# EAGLE board hackaday.com-ir-receiver-v1a (EAGLE 5.02)
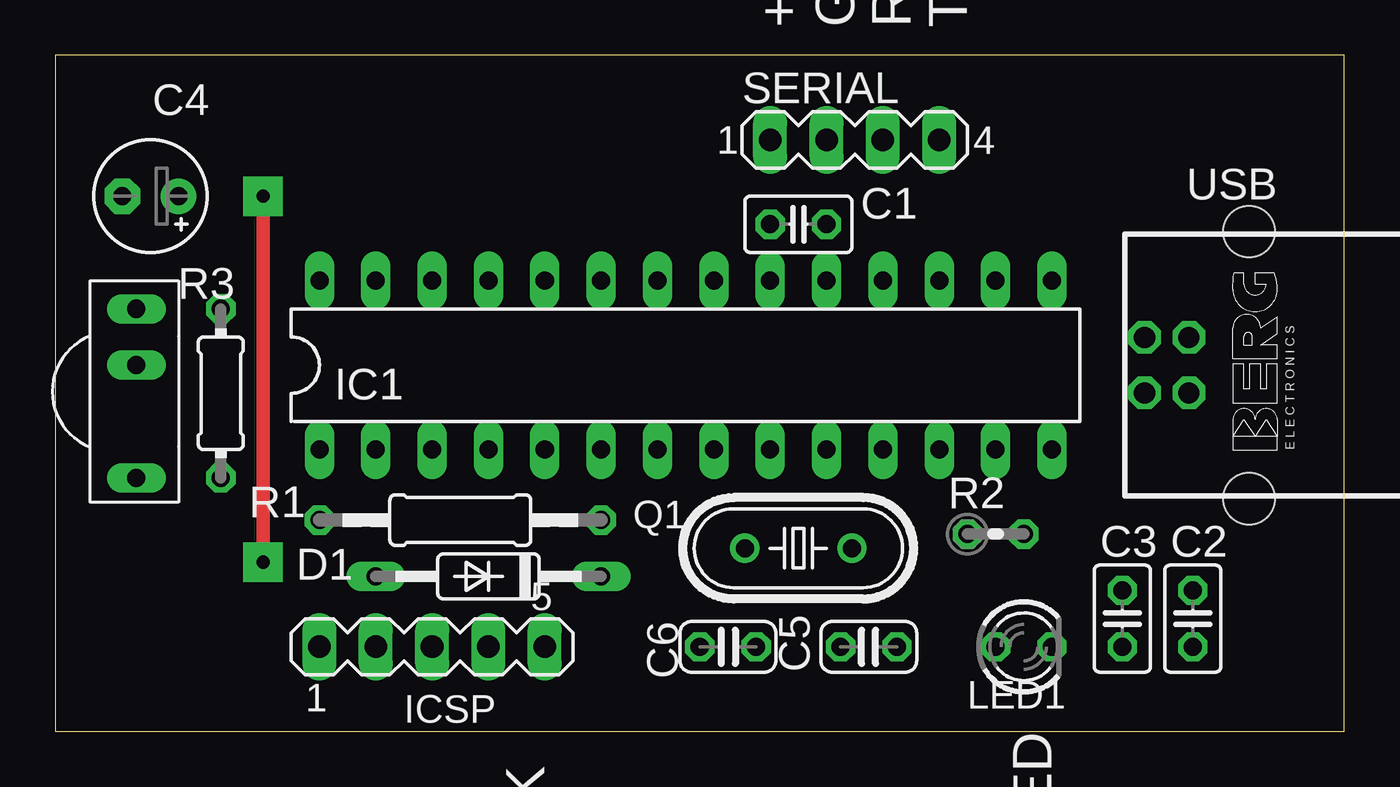
[diagram p0: board, top side]
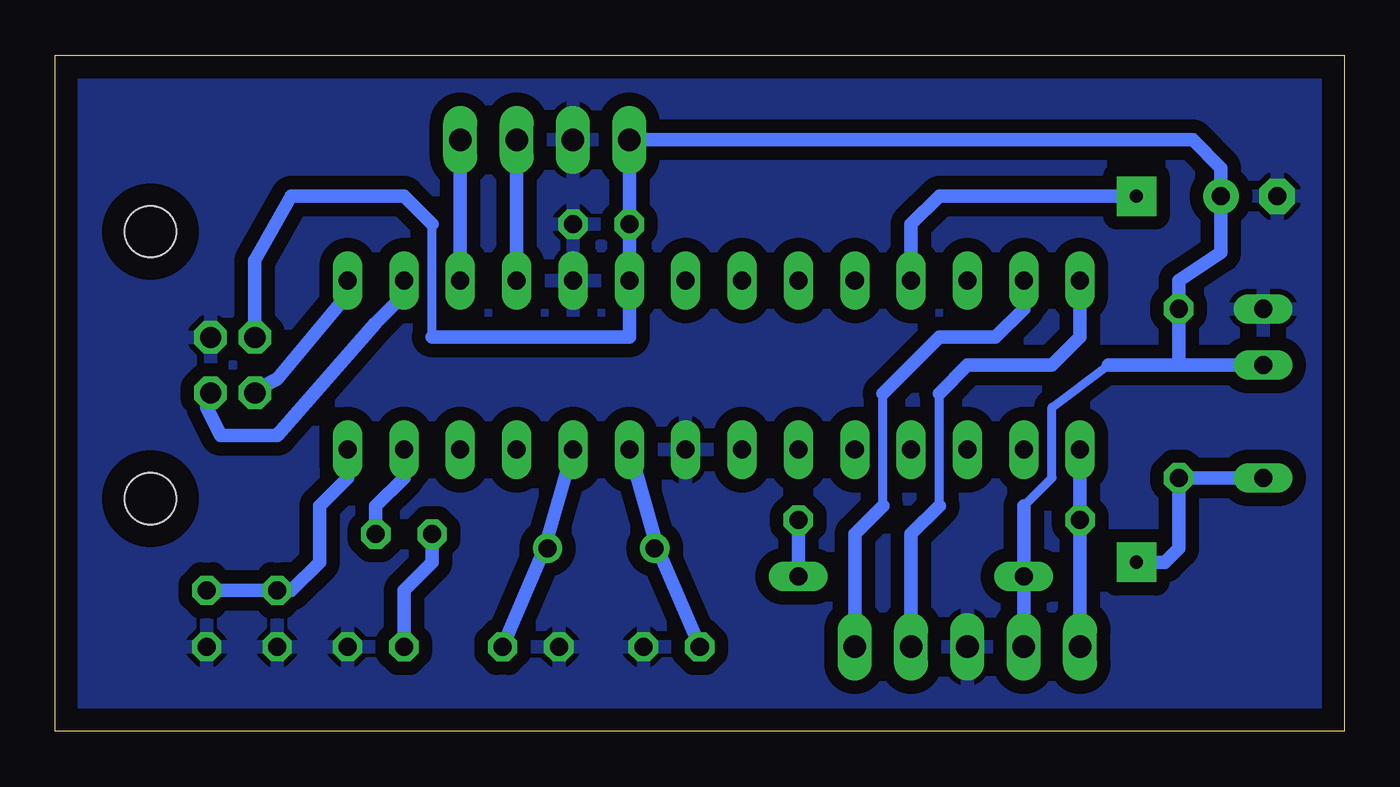
[diagram p1: board, bottom side, seen from below]

Size 58.09 x 30.47 mm. Coordinates in mm from the lower left corner, seen from the top.
Outline: 0,0 58.09,0 58.09,30.47 0,30.47 0,0
Copper layers (1*16): Top 0.035mm / dielectric 1.5mm / Bottom 0.035mm
Design rules "10mils": minimum track width 10mil, minimum drill 24mil, track to track 10mil, track to pad 10mil, pad to pad 10mil, via to via 10mil, smd to smd 10mil, copper to edge 40mil, drill to drill 10mil, minimum pad ring 10mil, minimum via ring 8mil, stop-mask expansion 0mil, vias tented up to drill 0mil, thermal gap 10mil

## Footprints (pad centres in the part's own frame; a part is rotated, then mirrored left to right if it is on the bottom)
C025-025X050 = drill 0.813 octagon: 1 -1.27,0; 2 1.27,0
E2,5-5 = drill 0.813 pad 1.6 round: + -1.27,0 | drill 0.813 pad 1.6 octagon: - 1.27,0
C025-024X044 = drill 0.813 octagon: 1 -1.27,0; 2 1.27,0
DO35-10 = drill 0.813 long: A 5.08,0; C -5.08,0
DIL28-3 = drill 0.813 long: 1 -16.51,-3.81; 2 -13.97,-3.81; 3 -11.43,-3.81; 4 -8.89,-3.81; 5 -6.35,-3.81; 6 -3.81,-3.81; 7 -1.27,-3.81; 8 1.27,-3.81; 9 3.81,-3.81; 10 6.35,-3.81; 11 8.89,-3.81; 12 11.43,-3.81; 13 13.97,-3.81; 14 16.51,-3.81; 15 16.51,3.81; 16 13.97,3.81; 17 11.43,3.81; 18 8.89,3.81; 19 6.35,3.81; 20 3.81,3.81; 21 1.27,3.81; 22 -1.27,3.81; 23 -3.81,3.81; 24 -6.35,3.81; 25 -8.89,3.81; 26 -11.43,3.81; 27 -13.97,3.81; 28 -16.51,3.81
MA05-1 = drill 1.016 long: 1 -5.08,0; 2 -2.54,0; 3 0,0; 4 2.54,0; 5 5.08,0
LED3MM = drill 0.813 octagon: A -1.27,0; K 1.27,0
HC49U-V = drill 0.813 round: 1 -2.413,0; 2 2.413,0
0207/12 = drill 0.813 octagon: 1 -6.35,0; 2 6.35,0
0204V = drill 0.813 octagon: 1 -1.27,0; 2 1.27,0
0204/7 = drill 0.813 octagon: 1 -3.81,0; 2 3.81,0
MA04-1 = drill 1.016 long: 1 -3.81,0; 2 -1.27,0; 3 1.27,0; 4 3.81,0
TSOP17XX = drill 0.813 long: GND -3.81,0; OUT 3.81,0; V+ -1.27,0
PN61729 = drill 0.95 octagon: 1 1.25,4.71; 2 -1.25,4.71; 3 -1.25,2.71; 4 1.25,2.71 | hole 2.3: -6.02,0; 6.02,0

## Placement (x,y rotation side)
C1  0.1uf  [C025-025X050]  33.49,22.86 0 top
C2  0.1uf  [C025-025X050]  51.27,5.08 270 top
C3  0.1uf  [C025-025X050]  48.09,5.08 270 top
C4  4.7Uf  [E2,5-5]  4.28,24.12 180 top
C5  27pf  [C025-024X044]  36.67,3.81 180 top
C6  27pf  [C025-024X044]  30.32,3.81 0 top
D1  1N4148  [DO35-10]  19.52,6.98 180 top
IC1  PIC18F2550_28DIP  [DIL28-3]  28.41,16.51 0 top
ICSP  [MA05-1]  16.98,3.81 0 top
LED1  [LED3MM]  43.65,3.81 0 top
Q1  20Mhz  [HC49U-V]  33.49,8.25 180 top
R1  10k  [0207/12]  18.25,9.52 0 top
R2  330R  [0204V]  42.38,8.88 0 top
R3  10k  [0204/7]  7.45,15.24 90 top
SERIAL  [MA04-1]  36.03,26.66 0 top
TSOP-1738  TSOP1736  [TSOP17XX]  3.64,15.24 270 top
USB  [PN61729]  53.81,16.51 90 top

## Library data of the parts
C1-C6 R1-R3 = rcl
D1 = diode
IC1 = microchip
ICSP SERIAL = con-lstb
LED1 = led
Q1 = crystal
TSOP-1738 = tsop
USB = con-berg

## Nets
GND: C1.2 C2.2 C3.2 C4.- C5.2 C6.2 IC1.8 IC1.19 ICSP.3 LED1.K SERIAL.2 TSOP-1738.GND USB.4
IRDATA: IC1.25 R3.1 TSOP-1738.OUT
MCLR: IC1.1 ICSP.1 R1.1
N$1: C6.1 IC1.9 Q1.2
N$2: C5.1 IC1.10 Q1.1
N$3: C2.1 C3.1 IC1.14
N$4: IC1.17 SERIAL.4
N$5: IC1.18 SERIAL.3
N$7: LED1.A R2.1
N$17: D1.C R1.2
N$27: IC1.13 R2.2
PGC: IC1.27 ICSP.5
PGD: IC1.28 ICSP.4
RC4: IC1.15 USB.2
RC5: IC1.16 USB.3
VCC: C1.1 C4.+ D1.A IC1.20 ICSP.2 R3.2 SERIAL.1 TSOP-1738.V+ USB.1

## Tracks (layer width: path | path; a pad name or v marks a point on that pad's centre or on a via)
GND
  pour Bottom (isolate 0.61): 0.47,29.2 57.62,29.2 57.62,1.27 0.47,1.27
IRDATA  (via drill 0.6 pad 1.78)
  Top 0.61: v9.36,7.62 v9.36,24.12
  Bottom 0.61: TSOP-1738.OUT R3.1 7.45,8.25 8.09,7.62 v9.36,7.62 | v9.36,24.12 18.25,24.12 19.52,22.86 IC1.25
MCLR
  Bottom 0.61: ICSP.1 11.9,8.88 | 11.9,8.88 R1.1 | 11.9,8.88 IC1.1
N$1
  Bottom 0.61: C6.1 30.95,8.25 | 30.95,8.25 Q1.2 | 30.95,8.25 IC1.9
N$2
  Bottom 0.61: 36.03,8.25 Q1.1 | 36.03,8.25 IC1.10 | C5.1 36.03,8.25
N$3
  Bottom 0.61: C2.1 C3.1 47.46,6.35 46.19,7.62 46.19,10.15 44.92,11.42 IC1.14
N$4
  Bottom 0.61: IC1.17 SERIAL.4
N$5
  Bottom 0.61: IC1.18 SERIAL.3
N$7
  Bottom 0.61: LED1.A 42.38,6.35 41.11,7.62 R2.1
N$17
  Bottom 0.61: D1.C R1.2
N$27
  Bottom 0.61: IC1.13 42.38,11.42 43.65,10.15 R2.2
N$31
  pour Bottom (isolate 0.61): 0.47,29.2 57.62,29.2 57.62,1.27 0.47,1.27
PGC
  Bottom 0.406: 20.79,10.15 20.79,15.24
  Bottom 0.61: ICSP.5 22.06,8.88 20.79,10.15 | 20.79,15.24 18.25,17.77 15.71,17.77 14.44,19.05 IC1.27
PGD
  Bottom 0.406: 18.25,10.15 18.25,15.24
  Bottom 0.61: ICSP.4 19.52,8.88 18.25,10.15 | 18.25,15.24 16.98,16.51 13.17,16.51 11.9,17.77 IC1.28
RC4
  Bottom 0.61: 49.36,15.24 49.34,15.26 USB.2 48.75,15.26 49.36,15.24 | IC1.15 44.92,19.68 48.09,15.87 49.36,15.24
RC5
  Bottom 0.406: 51.27,15.24 51.25,15.26 USB.3
  Bottom 0.61: IC1.16 42.38,19.68 43.65,18.41 48.09,13.33 50.64,13.33 51.27,14.6 51.27,15.24
VCC
  Bottom 0.406: 41.11,17.77 41.11,22.86 | 10.63,16.51 13.17,14.6 13.17,11.42 14.44,10.15 | SERIAL.1 32.22,17.77
  Bottom 0.61: ICSP.2 14.44,6.35 | 14.44,6.35 D1.A | USB.1 49.1,21.22 47.46,24.12 42.38,24.12 41.11,22.86 | 41.11,17.77 32.22,17.77 IC1.20 C1.1 SERIAL.1 6.82,26.66 5.55,25.4 C4.+ 5.55,21.59 7.45,20.32 R3.2 7.45,16.51 | 14.44,6.35 14.44,10.15 | 10.63,16.51 7.45,16.51 | 7.45,16.51 TSOP-1738.V+

## Text on the board
tNames: Serial Port | +5V | GND | RX | TX | USB | MCLR | +5V | GND | DATA | CLOCK | Power LED | Programming Header